# Altium PCB key_pcb_assy FPC.PcbDoc
Units mm, origin at the board's own origin, x right, y up, seen from the top; angles counter-clockwise.
Board outline 12 x 25.01 mm, 2 copper layers (Top Layer, Bottom Layer); 2 components, 2 nets, 374 pads, 21 vias.
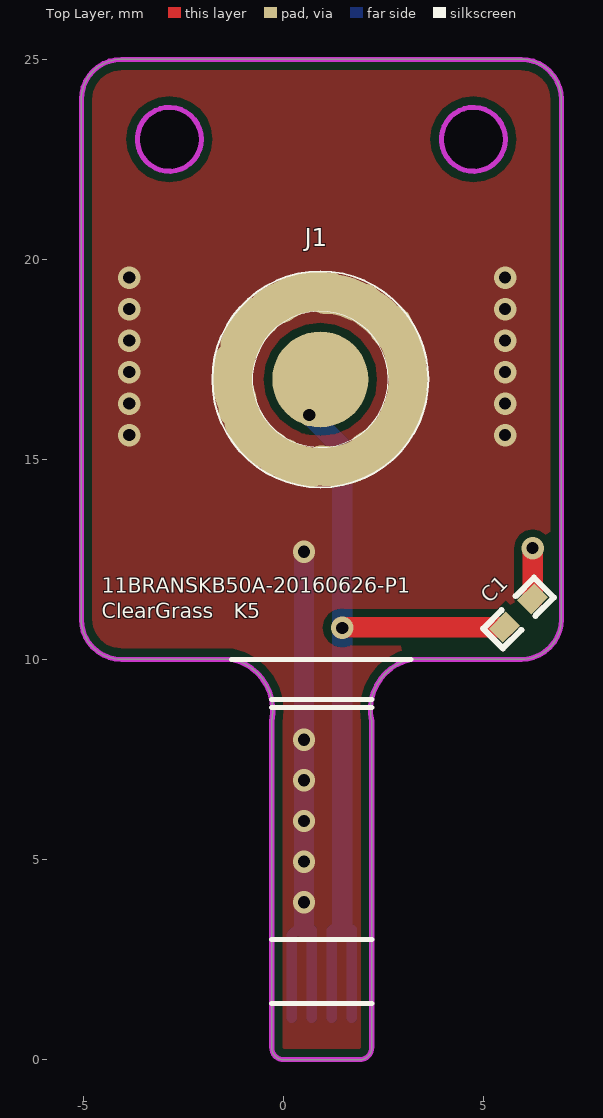
[diagram p0: Top Layer view]
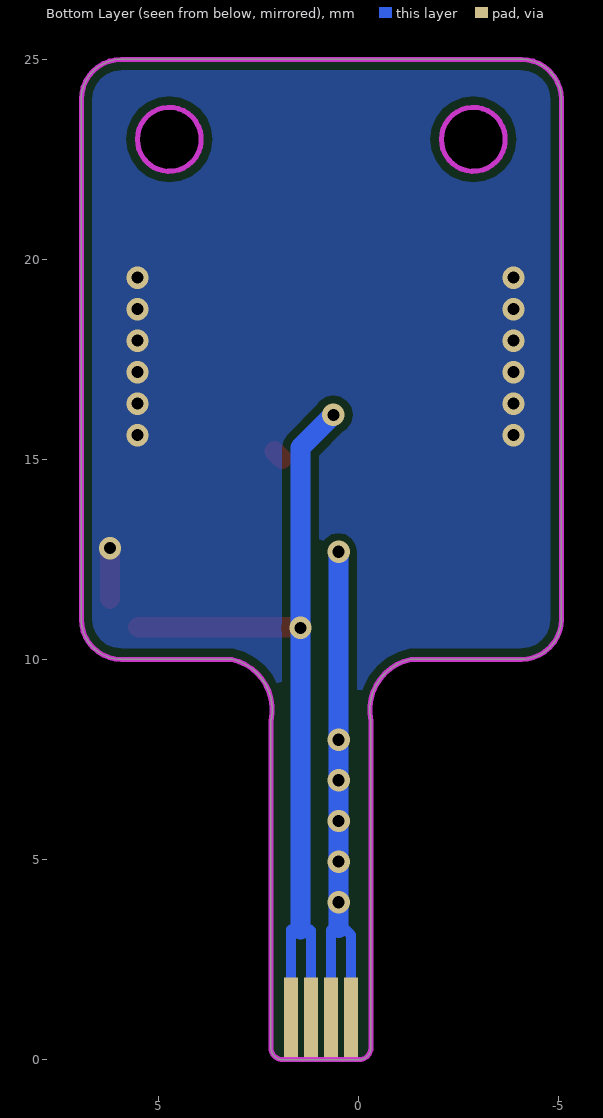
[diagram p1: Bottom Layer view, seen from below]

## Layer stack, top to bottom
Top Solder: solder mask 0.0102, Solder Resist, Dk 3.5
Top Layer: signal copper 0.0356
Dielectric1: dielectric 0.32, FR-4, Dk 4.8
Bottom Layer: signal copper 0.0356
Bottom Solder: solder mask 0.0102, Solder Resist, Dk 3.5

## Board outline
-4.06,10.01 -1.3,10.01 cw(c-1.57,8.739) -0.3,8.469 -0.3,0.3 ccw(c0,0.3) 0,0 1.9,0 ccw(c1.9,0.3) 2.2,0.3 2.2,8.469 cw(c3.46,8.749) 3.179,10.01 5.94,10.01 ccw(c5.94,11.01) 6.94,11.01 6.94,24.01 ccw(c5.94,24.01) 5.94,25.01 -4.06,25.01 ccw(c-4.06,24.01) -5.061,24.01 -5.061,11.01 ccw(c-4.06,11.01)
cut-out: -2.887,23.836 cw(c-2.887,23.01) -2.061,23.01 cw(c-2.886,23.01) -2.886,22.185 -2.921,22.185 cw(c-2.921,22.947) -3.683,22.947 -3.683,23.074 cw(c-2.921,23.074) -2.921,23.836
cut-out: 4.699,23.836 4.713,23.836 cw(c4.713,23.01) 5.539,23.01 5.539,22.898 cw(c4.826,22.898) 4.826,22.185 4.699,22.185 cw(c4.699,22.947) 3.937,22.947 3.937,23.074 cw(c4.699,23.074)

## Design rules (kind name [scope] priority, off if disabled: settings)
Clearance [All] p1: gap=0.203
PolygonConnect [All] p1: connectstyle=Direct reliefconductorwidth=0.254 reliefentries=4 polygonreliefangle="90 Angle" airgapwidth=0.254
RoutingVias [All] p1: holewidth=0.711 width=1.27 viastyle="Through Hole" minholewidth=0.305 minwidth=0.559 maxholewidth=0.711 maxwidth=1.27
SilkToSolderMaskClearance SilkscreenOverComponentPads [IsPad] p1: minsilkscreentomaskgap=0.254 clearancetoexposedcopper=TRUE
SolderMaskExpansion [All] p1: expansion=0.102
Width [All] p1: maxlimit=2.54 minlimit=0.254 preferedwidth=0.254
29 further rules are at their usual default settings.

## Components (designator, comment, footprint, x,y, rotation, side; value= is the part's Value field where it differs from the comment)
C1 "0.1uF/10V" 0402C 5.868,11.167 r45 top
J1 "Guozaipian" "5MM GUOZHAIPIAN" 0.94,17.01 r0 top locked

## Footprints (in the part's own frame and the unit in brackets; to place one, negate y for a bottom-side part, rotate by r counter-clockwise, add the part's x,y. Pads: shape width x height; smd on the part's side, far side on the other; paste and mask are expansions set on the pad)
"5MM GUOZHAIPIAN" [mm]
  round 2.4 smd: 1(-0.025,-0.001)
  round 1 smd: 2(-2.223,0.037) 2(-2.223,0.011) 2(-2.223,0.064) 2(-2.222,-0.015) 2(-2.222,0.09) 2(-2.221,-0.041) 2(-2.221,0.116) 2(-2.22,-0.067) 2(-2.22,0.142) 2(-2.217,-0.093) 2(-2.217,0.168) 2(-2.215,-0.119) 2(-2.215,0.194) 2(-2.212,-0.145) 2(-2.212,0.22) 2(-2.209,-0.171) 2(-2.209,0.246) 2(-2.205,-0.197) 2(-2.205,0.272) 2(-2.2,-0.223) 2(-2.2,0.298) 2(-2.196,-0.249) 2(-2.196,0.324) 2(-2.19,-0.274) 2(-2.19,0.349) 2(-2.185,-0.3) 2(-2.185,0.375) 2(-2.179,-0.325) 2(-2.179,0.4) 2(-2.172,-0.351) 2(-2.172,0.426) 2(-2.165,-0.376) 2(-2.165,0.451) 2(-2.158,-0.401) 2(-2.158,0.476) 2(-2.15,-0.426) 2(-2.141,-0.451) 2(-2.133,-0.476) 2(-2.124,-0.5) 2(-2.114,-0.524) 2(-2.069,-0.75) 2(-2.023,0.857) 2(-2.014,0.881) 2(-2.006,0.906) 2(-1.997,0.931) 2(-1.987,0.955) 2(-1.977,0.979) 2(-1.967,1.003) 2(-1.956,1.027) 2(-1.944,1.051) 2(-1.933,1.074) 2(-1.926,-1.057) 2(-1.921,1.097) 2(-1.916,-1.081) 2(-1.908,1.12) 2(-1.905,-1.105) 2(-1.895,1.133) 2(-1.895,1.143) 2(-1.894,-1.128) 2(-1.883,1.156) 2(-1.882,1.166) 2(-1.882,-1.152) 2(-1.87,-1.175) 2(-1.869,1.178) 2(-1.868,1.188) 2(-1.857,-1.198) 2(-1.856,1.201) 2(-1.854,1.21) 2(-1.844,-1.221) 2(-1.842,1.223) 2(-1.84,1.232) 2(-1.831,-1.243) 2(-1.827,1.244) 2(-1.825,1.253) 2(-1.817,-1.265) 2(-1.812,1.266) 2(-1.81,1.275) 2(-1.803,-1.288) 2(-1.797,1.287) 2(-1.794,1.296) 2(-1.789,-1.309) 2(-1.781,1.308) 2(-1.778,1.316) 2(-1.774,-1.331) 2(-1.762,1.337) 2(-1.759,-1.352) 2(-1.749,1.35) 2(-1.745,1.357) 2(-1.743,-1.373) 2(-1.733,1.37) 2(-1.728,1.377) 2(-1.727,-1.394) 2(-1.716,1.39) 2(-1.711,-1.415) 2(-1.711,1.397) 2(-1.698,1.409) 2(-1.694,-1.435) 2(-1.693,1.416) 2(-1.677,-1.455) 2(-1.675,1.435) 2(-1.66,-1.474) 2(-1.657,1.454) 2(-1.642,-1.494) 2(-1.638,1.472) 2(-1.624,-1.513) 2(-1.619,1.49) 2(-1.606,-1.531) 2(-1.6,1.508) 2(-1.587,-1.55) 2(-1.58,1.525) 2(-1.568,-1.568) 2(-1.56,1.542) 2(-1.549,-1.585) 2(-1.54,1.559) 2(-1.529,-1.603) 2(-1.52,1.575) 2(-1.51,-1.62) 2(-1.489,-1.636) 2(-1.469,-1.653) 2(-1.448,-1.669) 2(-1.427,-1.684) 2(-1.406,-1.699) 2(-1.384,-1.714) 2(-1.362,-1.729) 2(-1.34,-1.743) 2(-1.318,-1.756) 2(-1.295,-1.77) 2(-1.282,1.79) 2(-1.273,-1.783) 2(-1.25,-1.795) 2(-1.116,1.892) 2(-1.104,-1.918) 2(-1.092,1.903) 2(-1.068,1.913) 2(-1.044,1.923) 2(-1.042,1.896) 2(-1.021,1.911) 2(-1.019,1.933) 2(-0.999,1.927) 2(-0.978,1.941) 2(-0.956,1.956) 2(-0.952,-1.969) 2(-0.934,1.97) 2(-0.912,1.984) 2(-0.889,1.997) 2(-0.866,2.01) 2(-0.843,2.022) 2(-0.82,2.034) 2(-0.799,-2.071) 2(-0.797,2.046) 2(-0.773,2.057) 2(-0.749,2.068) 2(-0.725,2.079) 2(-0.701,2.089) 2(-0.677,2.098) 2(-0.672,-2.096) 2(-0.652,2.107) 2(-0.627,2.116) 2(-0.603,2.124) 2(-0.578,2.132) 2(-0.552,2.14) 2(-0.527,2.147) 2(-0.52,-2.147) 2(-0.502,2.153) 2(-0.476,2.159) 2(-0.451,2.165) 2(-0.425,2.17) 2(-0.399,2.175) 2(-0.393,-2.172) 2(-0.374,2.179) 2(-0.348,2.183) 2(-0.322,2.187) 2(-0.296,2.19) 2(-0.27,2.192) 2(-0.244,2.194) 2(-0.241,-2.198) 2(-0.218,2.196) 2(-0.191,2.197) 2(-0.165,2.198) 2(-0.139,2.198) 2(-0.139,2.198) 2(-0.113,2.198) 2(-0.087,2.197) 2(-0.06,2.196) 2(-0.034,2.194) 2(-0.008,2.192) 2(0.006,-2.155) 2(0.018,2.19) 2(0.032,-2.159) 2(0.044,2.187) 2(0.058,-2.162) 2(0.07,2.183) 2(0.084,-2.165) 2(0.096,2.179) 2(0.101,2.133) 2(0.11,-2.168) 2(0.121,2.175) 2(0.127,2.134) 2(0.136,-2.17) 2(0.153,2.134) 2(0.153,2.134) 2(0.162,-2.171) 2(0.179,2.134) 2(0.188,-2.172) 2(0.205,2.133) 2(0.214,-2.173) 2(0.217,2.171) 2(0.232,2.132) 2(0.24,-2.173) 2(0.258,2.131) 2(0.267,-2.173) 2(0.284,2.129) 2(0.293,-2.172) 2(0.31,2.126) 2(0.319,-2.171) 2(0.336,2.123) 2(0.345,-2.17) 2(0.362,2.12) 2(0.371,-2.168) 2(0.388,2.116) 2(0.397,-2.165) 2(0.414,2.112) 2(0.423,-2.162) 2(0.439,2.107) 2(0.449,-2.159) 2(0.465,2.102) 2(0.475,-2.155) 2(0.491,2.096) 2(0.501,-2.151) 2(0.516,2.09) 2(0.527,-2.146) 2(0.541,2.083) 2(0.552,-2.141) 2(0.567,2.076) 2(0.578,-2.135) 2(0.592,2.069) 2(0.603,-2.129) 2(0.617,2.061) 2(0.629,-2.122) 2(0.641,2.053) 2(0.654,-2.115) 2(0.666,2.044) 2(0.679,-2.108) 2(0.691,2.035) 2(0.704,-2.1) 2(0.715,2.025) 2(0.729,-2.092) 2(0.739,2.015) 2(0.753,-2.083) 2(0.763,2.005) 2(0.778,-2.074) 2(0.787,1.994) 2(0.802,-2.064) 2(0.811,1.982) 2(0.827,-2.054) 2(0.834,1.971) 2(0.851,-2.044) 2(0.857,1.959) 2(0.874,-2.033) 2(0.898,-2.021) 2(0.921,-2.01) 2(0.945,-1.998) 2(0.968,-1.985) 2(0.99,-1.972) 2(1.013,-1.959) 2(1.035,-1.945) 2(1.042,1.904) 2(1.057,-1.931) 2(1.079,-1.917) 2(1.093,1.854) 2(1.101,-1.902) 2(1.122,-1.887) 2(1.143,-1.871) 2(1.164,-1.855) 2(1.172,-1.798) 2(1.184,-1.839) 2(1.196,-1.788) 2(1.205,-1.822) 2(1.217,-1.788) 2(1.22,-1.777) 2(1.225,-1.805) 2(1.238,-1.773) 2(1.244,-1.767) 2(1.249,1.74) 2(1.259,-1.757) 2(1.268,-1.755) 2(1.271,1.725) 2(1.28,-1.742) 2(1.291,-1.744) 2(1.293,1.711) 2(1.3,-1.725) 2(1.314,1.695) 2(1.315,-1.732) 2(1.32,-1.709) 2(1.335,1.68) 2(1.338,-1.719) 2(1.356,1.664) 2(1.36,-1.706) 2(1.376,1.648) 2(1.383,-1.693) 2(1.397,1.631) 2(1.405,-1.679) 2(1.417,1.614) 2(1.427,-1.665) 2(1.436,1.597) 2(1.449,-1.651) 2(1.456,1.579) 2(1.471,-1.636) 2(1.474,1.561) 2(1.492,-1.621) 2(1.493,1.543) 2(1.512,1.524) 2(1.513,-1.605) 2(1.534,-1.589) 2(1.554,-1.573) 2(1.677,1.32) 2(1.681,-1.37) 2(1.701,-1.353) 2(1.721,-1.336) 2(1.741,-1.319) 2(1.766,1.358) 2(1.789,1.235) 2(1.805,1.215) 2(1.821,1.194) 2(1.837,1.173) 2(1.852,1.152) 2(1.867,1.13) 2(1.881,1.108) 2(1.893,-1.08) 2(1.895,1.086) 2(1.909,1.064) 2(1.922,1.041) 2(1.935,1.019) 2(1.947,0.996) 2(1.959,0.972) 2(1.969,-0.902) 2(1.971,0.949) 2(1.982,0.925) 2(1.993,0.902) 2(2.004,0.878) 2(2.014,0.853) 2(2.023,0.829) 2(2.032,-0.865) 2(2.033,0.804) 2(2.041,0.78) 2(2.05,0.755) 2(2.057,0.73) 2(2.065,0.705) 2(2.071,-0.648) 2(2.072,0.68) 2(2.078,0.654) 2(2.085,0.629) 2(2.09,0.603) 2(2.095,0.578) 2(2.122,0.393) 2(2.147,-0.369) 2(2.147,0.215) 2(2.172,-0.191) 2(2.172,0.063)
  round 0.8 smd: 2(-2.082,0.939) 2(-1.65,1.65) 2(-1.498,1.498) 2(1.169,1.727) 2(1.448,-1.474) 2(1.677,1.168) 2(2.147,0.215) 2(2.223,-0.471)
  silkscreen extent -2.72,-2.7 2.68,2.7
0402C [mm]
  rect 0.6x0.5 smd: 1(-0.5,0) 2(0.5,0)
  silkscreen extent -0.9,-0.35 0.9,0.35, body extent -0.51,-0.25 0.51,0.25, height 0.5

## Part data
C1: library part CAP, "厂家：Murat"
J1: "Guozaipian switch"

## Free pads (board coordinates)
  rect 0.35x2 smd far side: 1(0.2,1.05) 2(0.7,1.05) 3(1.2,1.05) 4(1.7,1.05)

## Via types
v1: diameter 0.559, hole 0.305, Top Layer to Bottom Layer, tented both sides, 21 vias

## Nets (pads, with @x,y where several pads share a name; then routed paths per layer and width w, separated by ;. In a path a pad name is that pad's centre, name@x,y a point inside that pad or via, vN(x,y) a via of type N, cw(c..) or ccw(c..) an arc to the next point about the centre after c; other vN are vias at no path point)
BUTTON1: C1.1 J1.1 pad.3 pad.4 | length 22.1
  Top Layer w0.508: v1@1.479,10.813 C1.1
  Bottom Layer w0.254: pad.3 1.2,3.232 1.221,3.253 1.46,3.253 1.7,3.253 pad.4
  Bottom Layer w0.508: v1(0.639,16.12) 1.46,15.298 v1(1.46,10.795) 1.46,3.253
GND: C1.2 J1.2 pad.1 pad.2 | length 15.8
  Top Layer w0.508: J1.2@1.924,15.024 J1.2@2.112,15.212 ; C1.2 v1(6.221,12.79)
  Bottom Layer w0.254: pad.1 0.2,3.121 0.381,3.302 0.508,3.302 0.638,3.302 0.7,3.24 pad.2
  Bottom Layer w0.508: 0.508,3.302 v1(0.508,12.7)
  other v1: 0.508,3.937 0.508,4.953 0.508,5.969 0.508,6.985 0.508,8.001 -3.864,15.615 5.534,15.615 -3.864,16.402 5.534,16.402 -3.864,17.19 5.534,17.19 -3.864,17.977 5.534,17.977 -3.864,18.765 5.534,18.765 -3.864,19.552 5.534,19.552

## Polygon pours and split planes (outlines as drawn)
GND on Bottom Layer "Bottom Layer-No Net" (solid, remove dead copper, pour order 2): -6.985,26.162 -6.858,26.035 8.128,26.035 8.128,-1.27 6.731,-2.667 6.604,-2.54 -6.731,-2.54
GND on Top Layer "Bottom Layer-No Net" (solid, remove dead copper, pour order 4): -6.604,26.162 6.858,26.162 7.62,25.4 8.382,24.638 8.382,7.747 3.937,7.747 3.429,7.239 3.81,6.858 3.81,-1.905 -0.635,-1.905 -0.889,-2.159 -2.286,-0.762 -2.286,9.144 -7.112,9.144 -7.493,9.525

## Keep-outs
Keep-Out Layer:
  circle w0.127: c4.74,23.01 r0.799
  circle w0.127: c-2.86,23.01 r0.799
  lines w0.127: -5.061,11.01 ccw(c-4.06,11.01) -4.06,10.01 -1.3,10.01 cw(c-1.57,8.739) -0.3,8.469 -0.3,0.3 ccw(c0,0.3) 0,0 1.9,0 ccw(c1.9,0.3) 2.2,0.3 2.2,8.469 cw(c3.46,8.749) 3.179,10.01 5.94,10.01 ccw(c5.94,11.01) 6.94,11.01 6.94,24.01 ccw(c5.94,24.01) 5.94,25.01 -4.06,25.01 ccw(c-4.06,24.01) -5.061,24.01 -5.061,11.01

## Silkscreen, mask and mechanical layers (free items; w line width, h text height)
Top Overlay:
  lines w0.127: -1.3,10.01 3.179,10.01 ; -0.3,1.4 2.2,1.4 ; -0.3,3 2.2,3 ; -0.3,8.8 2.2,8.8 ; -0.3,9 2.2,9
  text "11BRANSKB50A-20160626-P1" at -4.546,11.548 h0.64
  text "ClearGrass" at -4.546,10.913 h0.64
  text "K5" at -1.244,10.913 h0.64